# Altium PCB PCB1.PcbDoc
Units mm, origin at the board's own origin, x right, y up, seen from the top; angles counter-clockwise.
Board outline 21.25 x 16 mm, 2 copper layers (Top Layer, Bottom Layer); 2 components, 6 nets, 16 pads, 0 vias.
Unrouted connection lines stored in the file: 2.
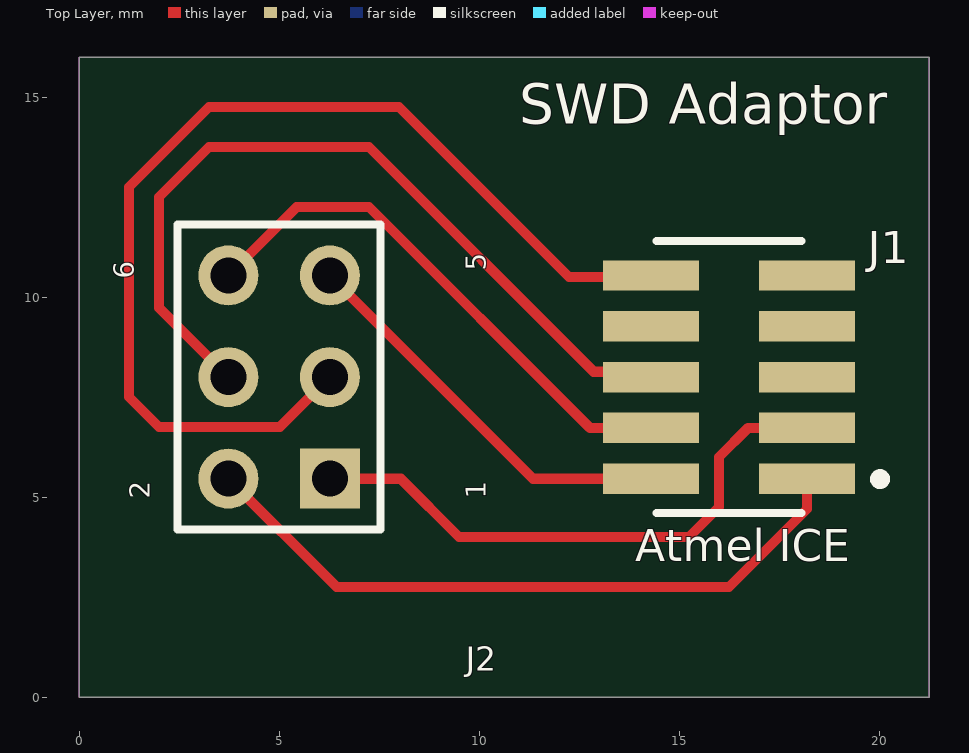
[diagram p0: Top Layer view]
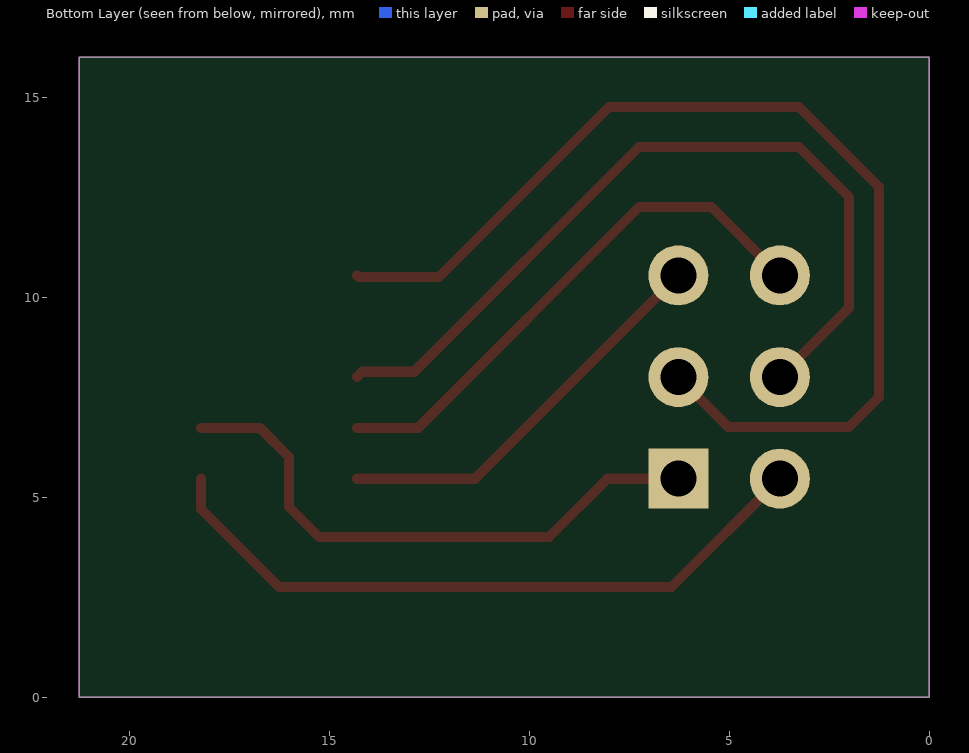
[diagram p1: Bottom Layer view, seen from below]

## Layer stack, top to bottom
Top Solder: solder mask 0.0102, Solder Resist, Dk 3.5
Top Layer: signal copper 0.0356
Dielectric 1: dielectric 0.32, FR-4, Dk 4.8
Bottom Layer: signal copper 0.0356
Bottom Solder: solder mask 0.0102, Solder Resist, Dk 3.5

## Board outline
0,0 21.25,0 21.25,16 0,16

## Design rules (kind name [scope] priority, off if disabled: settings)
Clearance [All] p1: gap=0.254 ignorepadtopadclearanceinfootprint=FALSE except(0: Arc-Hole Track-Hole SMDPad-Hole THPad-Hole Via-Hole Fill-Hole Poly-Hole Region-Hole Text-Hole)
PolygonConnect [All] p1: connectstyle=Relief reliefconductorwidth=0.254 reliefentries=4 polygonreliefangle="90 Angle" airgapwidth=0.254
RoutingVias [All] p1: holewidth=0.711 width=1.27 viastyle="Through Hole" minholewidth=0.711 minwidth=1.27 maxholewidth=0.711 maxwidth=1.27
SolderMaskExpansion [All] p1: expansion=0.102 istentingtop=FALSE
Width [All] p1: maxlimit=0.254 minlimit=0.254 preferedwidth=0.254
30 further rules are at their usual default settings.

## Components (designator, comment, footprint, x,y, rotation, side; value= is the part's Value field where it differs from the comment)
J1 "Connector 10 pin" Amphenol_ICC_-_FCI_0_MFG 16.25,8 r90 top
J2 "Connector" DS1013-6 5,8 r90 top locked

## Footprints (in the part's own frame and the unit in brackets; to place one, negate y for a bottom-side part, rotate by r counter-clockwise, add the part's x,y. Pads: shape width x height; smd on the part's side, far side on the other; paste and mask are expansions set on the pad)
Amphenol_ICC_-_FCI_0_MFG [mm]
  rect 0.76x2.4 smd paste+0 mask+0: 1(-2.54,-1.95) 2(-2.54,1.95) 3(-1.27,-1.95) 4(-1.27,1.95) 5(0,-1.95) 6(0,1.95) 7(1.27,-1.95) 8(1.27,1.95) 9(2.54,-1.95) 10(2.54,1.95)
  silkscreen extent -3.4,-3.9 3.4,1.82, body extent -3.5,-3.25 3.5,3.25, height 0.25
DS1013-6 [mm] "Connector; Header; 3x2 Position"
  rect 1.5x1.5 hole 0.9: 1(-2.54,-1.27)
  round 1.5 hole 0.9: 2(-2.54,1.27) 3(0,-1.27) 4(0,1.27) 5(2.54,-1.27) 6(2.54,1.27)
  silkscreen extent -3.81,-2.54 3.81,2.54, body extent -7.71,-4.4 7.71,4.4, height 8.87

## Part data
J1: Part Number=20021121-00010C4LF
J2: library part "Connector 6 pin"

## Nets (pads, with @x,y where several pads share a name; then routed paths per layer and width w, separated by ;. In a path a pad name is that pad's centre, name@x,y a point inside that pad or via, vN(x,y) a via of type N, cw(c..) or ccw(c..) an arc to the next point about the centre after c; other vN are vias at no path point)
+3.3: J1.1 J2.2 | length 17.2
  Top Layer w0.254: J2.2 6.44,2.75 16.25,2.75 18.2,4.7 J1.1
GND: J1.3 J1.5 J1.9 J2.1 | length 14.4
  Top Layer w0.254: J2.1 8.04,5.46 9.5,4 15.25,4 16,4.75 16,6 16.73,6.73 J1.3
RESET: J1.10 J2.3 | length 26.8
  Top Layer w0.254: J2.3 5.02,6.75 2,6.75 1.25,7.5 1.25,12.75 3.25,14.75 8,14.75 12.25,10.5 14.26,10.5 J1.10
SWDCLK: J1.4 J2.6 | length 13.6
  Top Layer w0.254: J2.6 5.44,12.25 7.25,12.25 12.77,6.73 J1.4
SWDIO: J1.2 J2.5 | length 10.1
  Top Layer w0.254: J2.5 11.35,5.46 J1.2
SWO: J1.6 J2.4 | length 20.4
  Top Layer w0.254: J2.4 2,9.73 2,12.5 3.25,13.75 7.25,13.75 12.868,8.132 14.168,8.132 J1.6
pads on no net: J1.7 J1.8

## Keep-outs
Keep-Out Layer:
  the board outline again, w0.01

## Silkscreen, mask and mechanical layers (free items; w line width, h text height)
Top Overlay:
  text "SWD Adaptor" at 11,14.333 h1
  text "Atmel ICE" at 13.9,3.4 h0.8

## Text inside footprints (layer, text, board x,y; h text height)
J2: Top Overlay "1" at 10.17,4.96 h0.5 r90; Top Overlay "2" at 1.77,4.96 h0.5 r90; Top Overlay "5" at 10.17,10.66 h0.5 r90; Top Overlay "6" at 1.37,10.46 h0.5 r90